# Altium PCB Tigershark 3D R1.8.PcbDoc (part 3 of 4)
Units mil, origin at the board's own origin, x right, y up, seen from the top; angles counter-clockwise.
Board outline 5500 x 4600 mil, 4 copper layers (Top Layer, Groun Plane, Power Plane, Bottom Layer), stack 61.73 mil thick; 307 components, 237 nets, 994 pads, 1215 vias.
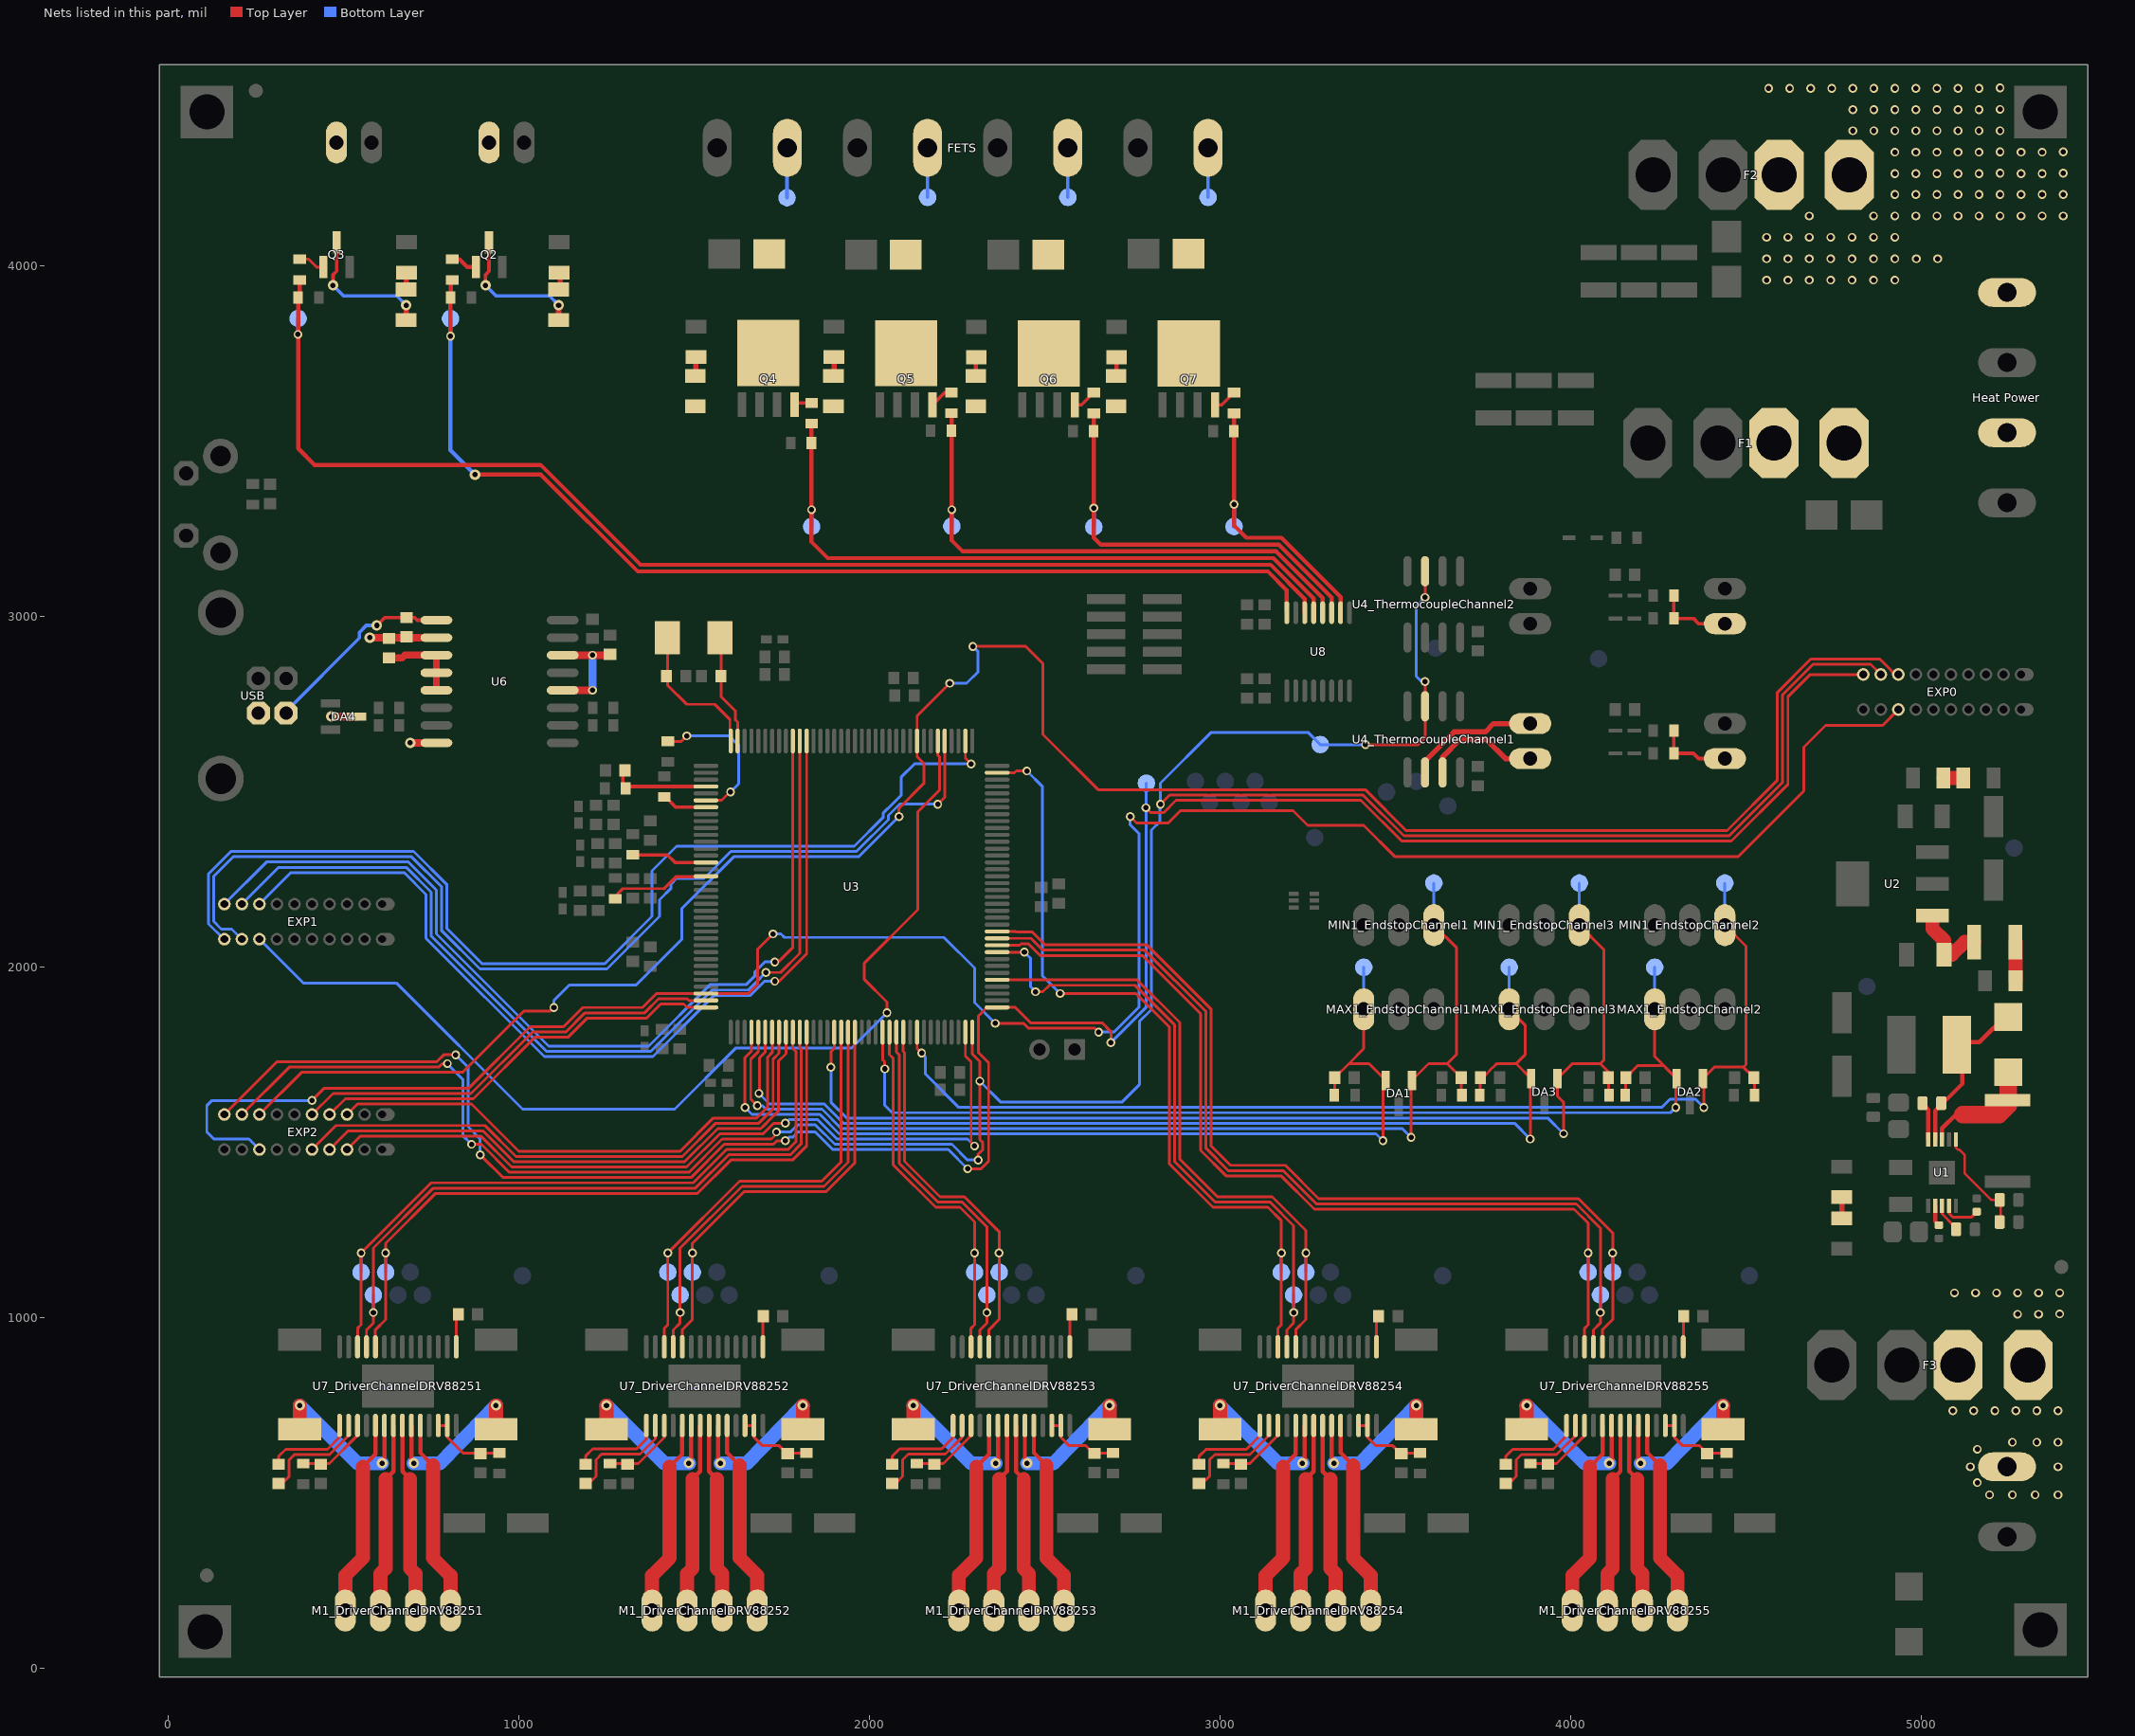
[diagram p5: the nets of this part, all layers, seen from the top]

## Via types
v1: diameter 25, hole 15, Top Layer to Bottom Layer, tented both sides, 594 vias
v2: diameter 30, hole 15, Top Layer to Bottom Layer, tented both sides, 518 vias
v3: diameter 19.68, hole 7.87, Top Layer to Bottom Layer, tented both sides, 75 vias
v4: diameter 50, hole 28, Top Layer to Bottom Layer, tented both sides, 10 vias
v5: diameter 45, hole 20, Top Layer to Bottom Layer, tented both sides, 9 vias
v6: diameter 30, hole 15, Top Layer to Bottom Layer, 9 vias

## Nets (pads, with @x,y where several pads share a name; then routed paths per layer and width w, separated by ;. In a path a pad name is that pad's centre, name@x,y a point inside that pad or via, vN(x,y) a via of type N, cw(c..) or ccw(c..) an arc to the next point about the centre after c; other vN are vias at no path point) (continued)
I2C_SCL: EXP0.3 EXP2.3 U3.70 | length 6434.8
  Top Layer w8: v1@412.5,1622.5 445,1655 857.57,1655 1032.57,1830 1127.57,1830 1182.57,1885 1352.57,1885 1392.46,1924.88 U3.70@1533.54,1924.88 1654.88,1924.88 1681.4,1951.4 1681.4,2051.4 v1(1725,2095) ; v1(2358.9,1840) 2440,1840 2453.5,1826.5 2642.4,1826.5 v1(2653.9,1815) ; v1(2743.9,2430) 2762.4,2411.5 2852.16,2411.5 2887.16,2446.5 3208.5,2446.5 3250,2405 3409.62,2405 3499.62,2315 4477.13,2315 4665,2502.87 4665,2627.57 4727.43,2690 4890,2690 EXP0.3@4935,2735
  Bottom Layer w8: EXP2.3@260,1480 230,1510 130,1510 110,1530 110,1605 125,1620 v1(410,1620) ; v1(1725,2095) 1747.57,2095 1757.57,2085 2212.57,2085 2300,1997.57 2300,1898.9 v1(2358.9,1840) ; v1(2653.9,1815) 2697.68,1815 2740,1857.32 2740,1857.43 2768.9,1886.32 2768.9,2381.1 2743.9,2406.1 v1(2743.9,2430)
I2C_SDA: EXP0.18 EXP2.18 U3.9 | length 6212.1
  Top Layer w8: EXP2.18@260,1580 380,1700 838.93,1700 1013.93,1875 1090,1875 v1(1100,1885) ; v1(2084.25,2430) 2084.25,2453.65 2154.9,2524.29 2154.9,2581.46 2135.91,2600.45 U3.9@2135.91,2645.35 2135.91,2717.01 v1(2228.9,2810) ; v1(2295,2915) 2446.21,2915 2495,2866.21 2495,2663.93 2652.43,2506.5 3414.19,2506.5 3530.69,2390 4446.07,2390 4590,2533.93 4590,2783.93 4685.07,2879 4882.01,2879 4914,2847.01 4914,2846 4925,2835 EXP0.18@4935,2835
  Bottom Layer w8: v1(1100,1885) 1100,1905 1144,1949 1334.67,1949 1465,2079.33 1465,2167.43 1612.57,2315 1969.25,2315 v1(2084.25,2430) ; v1(2228.9,2810) 2277.13,2810 2310,2842.87 2310,2900 v1(2295,2915)
INPUT_GND: C58.1 C59.1 DA4.3 U6.2 U6.8 USB.4 | length 337.2
  Top Layer w22: v2(465,2715) DA4.3@537.4,2715 ; v2(575,2940) U6.2@764.88,2940 ; v2(690,2640) U6.8@764.88,2640
MAX_ES1: C2_EndstopChannel1.1 DA1.2 MAX1_EndstopChannel1.1 R3_EndstopChannel1.2 TP10_EndstopChannel1.1 U3.76 | length 2781.9
  Top Layer w8: v1(1645,1600) 1645,1742.43 1663.46,1760.89 U3.76@1663.46,1814.65 ; R3_EndstopChannel1.2@3325.94,1635 3327.44,1636.5 C2_EndstopChannel1.1@3327.44,1685 3367.44,1725 ; MAX1_EndstopChannel1.1@3410,1880 3410,1767.56 3367.44,1725 ; v1(3465,1505) 3465,1669.8 DA1.2@3472.6,1677.4 3425,1725 3367.44,1725
  Bottom Layer w8: v1(1645,1600) 1665,1580 1858.64,1580 1913.64,1525 3445,1525 v1(3465,1505) ; MAX1_EndstopChannel1.1@3410,1880 TP10_EndstopChannel1.1@3410,2000
MAX_ES2: C2_EndstopChannel2.1 DA2.2 MAX1_EndstopChannel2.1 R3_EndstopChannel2.2 TP10_EndstopChannel2.1 U3.95 | length 3081.9
  Top Layer w8: U3.95@2037.48,1814.65 2037.48,1736.42 2043.9,1730 v1(2043.9,1710) ; R3_EndstopChannel2.2@4155.94,1635 4157.44,1636.5 C2_EndstopChannel2.1@4157.44,1685 4192.44,1720 4265,1720 ; MAX1_EndstopChannel2.1@4240,1880 4240,1745 DA2.2@4302.6,1682.4 4300,1679.8 v1(4300,1600)
  Bottom Layer w8: v1(2043.9,1710) 2043.9,1606.1 2065,1585 4285,1585 v1(4300,1600) ; MAX1_EndstopChannel2.1@4240,1880 TP10_EndstopChannel2.1@4240,2000
MAX_ES3: C2_EndstopChannel3.1 DA3.2 MAX1_EndstopChannel3.1 R3_EndstopChannel3.2 TP10_EndstopChannel3.1 U3.78 | length 3144.2
  Top Layer w8: v1(1685,1640) 1686.49,1641.49 1686.49,1741.49 1702.83,1757.83 U3.78@1702.83,1814.65 ; R3_EndstopChannel3.2@3740.94,1635 3742.44,1636.5 C2_EndstopChannel3.1@3742.44,1685 3749.95,1685 3770.81,1705.86 3770.81,1707.27 3777.25,1713.72 3778.67,1713.72 3790.39,1725.43 3845.43,1725.43 3870,1750 3870,1835 MAX1_EndstopChannel3.1@3825,1880 ; 3845,1725 DA3.2@3887.6,1682.4 3885,1679.8 v1(3885,1510)
  Bottom Layer w8: v1(1685,1640) 1715,1610 1871.07,1610 1926.07,1555 3840,1555 v1(3885,1510) ; MAX1_EndstopChannel3.1@3825,1880 TP10_EndstopChannel3.1@3825,2000
MCCDZ: EXP2.14 U3.72 | length 1207.9
  Top Layer w8: EXP2.14@460,1580 505,1625 870,1625 1045,1800 1140,1800 1195,1855 1365,1855 1404.88,1894.88 1470.12,1894.88 1479.49,1885.51 U3.72@1533.54,1885.51
MCCK: EXP2.15 U3.71 | length 1262.1
  Top Layer w8: EXP2.15@410,1580 470,1640 863.79,1640 1038.79,1815 1133.79,1815 1188.79,1870 1358.79,1870 1398.67,1909.88 1480.12,1909.88 1484.8,1905.2 U3.71@1533.54,1905.2
MCDZ0: EXP2.8 U3.107 | length 2265.2
  Top Layer w8: EXP2.8@510,1480 548.5,1518.5 890.95,1518.5 979.45,1430 1478.64,1430 1573.64,1525 1696.87,1525 1711.5,1539.63 1711.5,1539.73 1725.27,1553.5 1725.37,1553.5 1726.87,1555 v1(1760,1555) ; U3.107@2273.7,1814.65 2273.7,1746.3 2290,1730 2290,1500 v1(2300,1490)
  Bottom Layer w8: v1(1760,1555) 1770,1565 1852.43,1565 1907.43,1510 2280,1510 v1(2300,1490)
MCDZ1: EXP2.7 U3.81 | length 1633
  Top Layer w8: EXP2.7@460,1480 513.5,1533.5 897.16,1533.5 985.66,1445 1472.43,1445 1567.43,1540 1690.66,1540 1696.5,1545.84 1696.5,1545.95 1719.05,1568.5 1719.16,1568.5 1740,1589.34 1740,1731.36 1761.89,1753.25 U3.81@1761.89,1814.65
MCDZ2: EXP2.6 U3.80 | length 1662.4
  Top Layer w8: EXP2.6@410,1480 478.5,1548.5 903.37,1548.5 991.87,1460 1466.21,1460 1561.21,1555 1684.34,1555 1712.84,1583.5 1712.95,1583.5 1725,1595.55 1725,1737.57 1742.2,1754.78 U3.80@1742.2,1814.65
MCDZ3: EXP2.13 U3.79 | length 1538.9
  Top Layer w8: EXP2.13@510,1580 540,1610 865,1610 1000,1475 1460,1475 1555,1570 1678.13,1570 1706.63,1598.5 1706.73,1598.5 1710,1601.77 1710,1743.79 1722.52,1756.31 U3.79@1722.52,1814.65
MIN_ES1: C1_EndstopChannel1.1 DA1.1 MIN1_EndstopChannel1.1 R2_EndstopChannel1.2 TP9_EndstopChannel1.1 U3.77 | length 3076.9
  Top Layer w8: v1(1679.95,1605.05) 1661.5,1623.5 1661.5,1737.71 1683.15,1759.36 U3.77@1683.15,1814.65 ; v1(3545,1515) 3545,1665 3540,1670 DA1.1@3547.4,1677.4 3595,1725 3648.03,1725 ; MIN1_EndstopChannel1.1@3610,2120 3675,2055 3675,1751.97 3648.03,1725 ; R2_EndstopChannel1.2@3690,1635 3688.03,1636.97 C1_EndstopChannel1.1@3688.03,1685 3648.03,1725
  Bottom Layer w8: v1(1679.95,1605.05) 1694.95,1605.05 1705,1595 1864.85,1595 1919.85,1540 3520,1540 v1(3545,1515) ; MIN1_EndstopChannel1.1@3610,2120 TP9_EndstopChannel1.1@3610,2240
MIN_ES2: C1_EndstopChannel2.1 DA2.1 MIN1_EndstopChannel2.1 R2_EndstopChannel2.2 TP9_EndstopChannel2.1 U3.100 | length 3267
  Top Layer w8: U3.100@2135.91,1814.65 2135.91,1767.99 v1(2148.9,1755) ; v1(4380,1600) 4380,1679.8 DA2.1@4377.4,1682.4 4410,1715 4493.03,1715 ; MIN1_EndstopChannel2.1@4440,2120 4500,2060 4500,1721.97 4493.03,1715 ; R2_EndstopChannel2.2@4525,1635 4525,1683.03 C1_EndstopChannel2.1@4523.03,1685 4493.03,1715
  Bottom Layer w8: v1(2148.9,1755) 2160,1743.9 2160,1695 2255,1600 4260,1600 4283.5,1623.5 4356.5,1623.5 v1(4380,1600) ; MIN1_EndstopChannel2.1@4440,2120 TP9_EndstopChannel2.1@4440,2240
MIN_ES3: C1_EndstopChannel3.1 DA3.1 MIN1_EndstopChannel3.1 R2_EndstopChannel3.2 TP9_EndstopChannel3.1 U3.88 | length 3281.5
  Top Layer w8: v1(1890,1715) 1890,1758.79 1899.69,1768.47 U3.88@1899.69,1814.65 ; v1(3980,1525) 3980,1615 3962.4,1632.6 DA3.1@3962.4,1682.4 4005,1725 4085,1725 ; MIN1_EndstopChannel3.1@4025,2120 4095,2050 4095,1734.91 4085.04,1724.96 4108.03,1701.97 C1_EndstopChannel3.1@4108.03,1685 R2_EndstopChannel3.2@4108.03,1636.97
  Bottom Layer w8: v1(1890,1715) 1890,1615 1935,1570 3935,1570 v1(3980,1525) ; MIN1_EndstopChannel3.1@4025,2120 TP9_EndstopChannel3.1@4025,2240
MISO: EXP0.19 EXP2.19 TP7.1 U3.108 U4_ThermocoupleChannel1.7 U4_ThermocoupleChannel2.7 | length 8055.1
  Top Layer w8: EXP2.19@210,1580 345,1715 771.87,1715 781.87,1725 v1(795.94,1725) ; v1(865,1495) 893.23,1495 973.23,1415 1484.85,1415 1579.85,1510 1720,1510 1735,1525 v1(1735,1530) ; U3.108@2293.39,1814.65 2293.39,1752.83 2315,1731.21 v1(2315,1675) 2315,1508.23 2323.5,1499.73 2323.5,1480.27 2310,1466.77 v1(2310,1450) ; v1(2830,2465) 2856.5,2491.5 3407.98,2491.5 3524.48,2375 4452.28,2375 4605,2527.72 4605,2777.72 4691.28,2864 4856,2864 EXP0.19@4885,2835 ; v1(3415,2635) 3565,2635 3585,2655 U4_ThermocoupleChannel1.7@3585,2744.49 v1(3585,2815) ; v1(3585,3055) U4_ThermocoupleChannel2.7@3585,3129.49
  Bottom Layer w8: v1@802.5,1717.5 840,1680 840,1520 v1(865,1495) ; v1(1735,1530) 1775,1530 1795,1550 1846.21,1550 1901.21,1495 2235,1495 2280,1450 v1(2310,1450) ; v1(2315,1675) 2375,1615 2720,1615 2770,1665 2770,1845 2803.9,1878.9 2803.9,2390.9 2828.9,2415.9 2828.9,2463.9 v1(2830,2465) 2830,2525 2975,2670 3251,2670 TP7.1@3286,2635 v1(3415,2635) ; v1(3585,2815) 3575,2815 3560,2830 3560,3030 v1(3585,3055)
MOD0E1: TP37_DriverChannelDRV88251.1 U3.84 U7_DriverChannelDRV88251.24 | length 2002.7
  Top Layer w8: U7_DriverChannelDRV88251.24@591.02,917.2 591.02,966.02 620,995 v1(620,1185) 620,1212.57 762.43,1355 1509.71,1355 1604.71,1450 1780.66,1450 1820.94,1490.28 U3.84@1820.94,1814.65
  Bottom Layer w8: TP37_DriverChannelDRV88251.1@620,1130 v1(620,1185)
MOD0E2: TP37_DriverChannelDRV88252.1 U3.91 U7_DriverChannelDRV88252.24 | length 1293.6
  Top Layer w8: U7_DriverChannelDRV88252.24@1466.02,917.2 1466.02,966.02 1495,995 v1(1495,1185) 1495,1212.57 1642.43,1360 1876.36,1360 1958.74,1442.38 U3.91@1958.74,1814.65
  Bottom Layer w8: TP37_DriverChannelDRV88252.1@1495,1130 v1(1495,1185)
MOD0E3: TP37_DriverChannelDRV88253.1 U3.98 U7_DriverChannelDRV88253.24 | length 1118.4
  Top Layer w8: U3.98@2096.54,1814.65 2096.54,1759.68 2100,1756.21 2100,1446.36 2201.36,1345 2270.76,1345 2370,1245.76 v1(2370,1185) 2370,995 2341.02,966.02 U7_DriverChannelDRV88253.24@2341.02,917.2
  Bottom Layer w8: TP37_DriverChannelDRV88253.1@2370,1130 v1(2370,1185)
MOD0E4: TP37_DriverChannelDRV88254.1 U3.113 U7_DriverChannelDRV88254.24 | length 1804.3
  Top Layer w8: U3.113@2364.25,1964.25 2763.17,1964.25 2885,1842.43 2885,1452.43 2992.43,1345 3149.08,1345 3245,1249.08 v1(3245,1185) 3245,995 3216.02,966.02 U7_DriverChannelDRV88254.24@3216.02,917.2
  Bottom Layer w8: TP37_DriverChannelDRV88254.1@3245,1130 v1(3245,1185)
MOD0E5: TP37_DriverChannelDRV88255.1 U3.120 U7_DriverChannelDRV88255.24 | length 2732.5
  Top Layer w8: U3.120@2364.25,2102.05 2417.95,2102.05 2420,2100 2465,2100 2501.38,2063.62 2791.08,2063.62 2975,1879.71 2975,1489.71 3029.71,1435 3186.36,1435 3281.36,1340 4022.43,1340 4120,1242.43 v1(4120,1185) 4120,995 4091.02,966.02 U7_DriverChannelDRV88255.24@4091.02,917.2
  Bottom Layer w8: TP37_DriverChannelDRV88255.1@4120,1130 v1(4120,1185)
MOD1E1: TP36_DriverChannelDRV88251.1 U3.83 U7_DriverChannelDRV88251.25 | length 2003.3
  Top Layer w8: U7_DriverChannelDRV88251.25@565.43,917.2 565.43,965.43 585,985 v1(585,1015) 585,1198.79 756.21,1370 1503.49,1370 1598.49,1465 1774.45,1465 1805,1495.55 1805,1766.21 1801.26,1769.95 U3.83@1801.26,1814.65
  Bottom Layer w8: v1(585,1015) TP36_DriverChannelDRV88251.1@585,1065
MOD1E2: TP36_DriverChannelDRV88252.1 U3.90 U7_DriverChannelDRV88252.25 | length 1291
  Top Layer w8: U7_DriverChannelDRV88252.25@1440.43,917.2 1440.43,965.43 1460,985 v1(1460,1015) 1460,1198.79 1636.21,1375 1870.15,1375 1939.06,1443.91 U3.90@1939.06,1814.65
  Bottom Layer w8: v1(1460,1015) TP36_DriverChannelDRV88252.1@1460,1065
MOD1E3: TP36_DriverChannelDRV88253.1 U3.97 U7_DriverChannelDRV88253.25 | length 1103.1
  Top Layer w8: U3.97@2076.85,1814.65 2076.85,1758.15 2085,1750 2085,1440.15 2195.15,1330 2264.54,1330 2335,1259.54 v1(2335,1015) 2335,985 2315.43,965.43 U7_DriverChannelDRV88253.25@2315.43,917.2
  Bottom Layer w8: v1(2335,1015) TP36_DriverChannelDRV88253.1@2335,1065
MOD1E4: TP36_DriverChannelDRV88254.1 U3.117 U7_DriverChannelDRV88254.25 | length 1863.9
  Top Layer w8: U3.117@2364.25,2042.99 v1(2442.01,2042.99) ; v1(2473.9,1930) 2495,1930 2513.5,1948.5 2757.71,1948.5 2870,1836.21 2870,1446.21 2986.21,1330 3142.87,1330 3210,1262.87 v1(3210,1015) 3210,985 3190.43,965.43 U7_DriverChannelDRV88254.25@3190.43,917.2
  Bottom Layer w8: v1(2442.01,2042.99) 2460,2025 2460,1943.9 v1(2473.9,1930) ; v1(3210,1015) TP36_DriverChannelDRV88254.1@3210,1065
MOD1E5: TP36_DriverChannelDRV88255.1 U3.119 U7_DriverChannelDRV88255.25 | length 2688.5
  Top Layer w8: U3.119@2364.25,2082.36 2461.26,2082.36 2495,2048.62 2784.87,2048.62 2960,1873.49 2960,1483.49 3023.49,1420 3180.15,1420 3275.15,1325 4016.21,1325 4085,1256.21 v1(4085,1015) 4085,985 4065.43,965.43 U7_DriverChannelDRV88255.25@4065.43,917.2
  Bottom Layer w8: v1(4085,1015) TP36_DriverChannelDRV88255.1@4085,1065
MOD2E1: TP35_DriverChannelDRV88251.1 U3.82 U7_DriverChannelDRV88251.26 | length 2014.6
  Top Layer w8: U7_DriverChannelDRV88251.26@539.84,917.2 539.84,969.84 550,980 v1(550,1185) 750,1385 1497.28,1385 1592.28,1480 1768.23,1480 1790,1501.77 1790,1760 1781.57,1768.43 U3.82@1781.57,1814.65
  Bottom Layer w8: TP35_DriverChannelDRV88251.1@550,1130 v1(550,1185)
MOD2E2: TP35_DriverChannelDRV88252.1 U3.89 U7_DriverChannelDRV88252.26 | length 1298.5
  Top Layer w8: U7_DriverChannelDRV88252.26@1414.84,917.2 1414.84,969.84 1425,980 v1(1425,1185) 1630,1390 1863.93,1390 1919.37,1445.44 U3.89@1919.37,1814.65
  Bottom Layer w8: TP35_DriverChannelDRV88252.1@1425,1130 v1(1425,1185)
MOD2E3: TP35_DriverChannelDRV88253.1 U3.96 U7_DriverChannelDRV88253.26 | length 1097.9
  Top Layer w8: U3.96@2057.17,1814.65 2057.17,1750.34 2067.4,1740.11 2067.4,1436.54 2188.93,1315 2258.33,1315 2300,1273.33 v1(2300,1185) 2300,980 2289.84,969.84 U7_DriverChannelDRV88253.26@2289.84,917.2
  Bottom Layer w8: TP35_DriverChannelDRV88253.1@2300,1130 v1(2300,1185)
MOD2E4: TP35_DriverChannelDRV88254.1 U3.143 U7_DriverChannelDRV88254.26 | length 2307.9
  Top Layer w8: U3.143@2364.25,2554.8 2413.7,2554.8 2418.9,2560 v1(2448.9,2560) ; v1(2543.9,1925) 2760,1925 2855,1830 2855,1440 2980,1315 3136.65,1315 3175,1276.65 v1(3175,1185) 3175,980 3164.84,969.84 U7_DriverChannelDRV88254.26@3164.84,917.2
  Bottom Layer w8: v1(2448.9,2560) 2493.9,2515 2493.9,1975 v1(2543.9,1925) ; TP35_DriverChannelDRV88254.1@3175,1130 v1(3175,1185)
MOD2E5: TP35_DriverChannelDRV88255.1 U3.118 U7_DriverChannelDRV88255.26 | length 2657.7
  Top Layer w8: U3.118@2364.25,2062.68 2428.46,2062.68 2432.27,2066.49 2453.51,2066.49 2486.38,2033.62 2778.66,2033.62 2945,1867.28 2945,1477.28 3017.28,1405 3173.93,1405 3268.93,1310 4010,1310 4050,1270 v1(4050,1185) 4050,980 4039.84,969.84 U7_DriverChannelDRV88255.26@4039.84,917.2
  Bottom Layer w8: TP35_DriverChannelDRV88255.1@4050,1130 v1(4050,1185)
MODE0_EXP1: EXP1.1 U3.2 | length 3019.5
  Top Layer w8: U3.2@2273.7,2645.35 2273.7,2596.3 v1(2290,2580)
  Bottom Layer w8: EXP1.1@160,2080 158.79,2080 115,2123.79 115,2266.21 178.79,2330 700,2330 795,2235 795,2110 895,2010 1244.94,2010 1380,2145.06 1380,2275 1450,2345 1956.83,2345 2038.79,2426.96 2038.79,2438.98 2068.31,2468.5 2068.5,2468.5 2090,2490 2090,2541.77 2128.23,2580 2275,2580
MODE0_EXP2: EXP1.20 U3.27 | length 2664.4
  Top Layer w8: v1(1730,2015) 1740,2015 1781.57,2056.57 U3.27@1781.57,2645.35
  Bottom Layer w8: EXP1.20@160,2180 280,2300 685,2300 765,2220 765,2095 1085,1775 1370,1775 1545,1950 1648.23,1950 1673.5,1975.27 1673.5,1987.29 1701.21,2015 v1@1720,2015
MODE1_EXP1: EXP1.2 U3.5 | length 2949.5
  Top Layer w8: v1(2195,2465) 2214.9,2484.9 2214.9,2645.1 U3.5@2214.65,2645.35
  Bottom Layer w8: EXP1.2@210,2080 181,2109 151,2109 130,2130 130,2260 185,2315 693.79,2315 780,2228.79 780,2103.79 888.79,1995 1251.16,1995 1401.5,2145.34 1401.5,2192.71 1434.39,2225.61 1434.39,2237.63 1450.27,2253.5 1528.5,2253.5 1605,2330 1963.04,2330 2054.02,2420.98 2054.02,2433 2074.52,2453.5 2074.71,2453.5 2086.21,2465 v1(2195,2465)
MODE1_EXP2: EXP1.19 U3.26 | length 2647.2
  Top Layer w8: v1(1705,1985) 1746.36,1985 1801.26,2039.9 U3.26@1801.26,2645.35
  Bottom Layer w8: EXP1.19@210,2180 315,2285 678.79,2285 750,2213.79 750,2088.79 1078.79,1760 1376.21,1760 1551.21,1935 1654.45,1935 1688.5,1969.05 1688.5,1969.71 1703.79,1985 v1(1705,1985)
MODE2_EXP1: EXP1.3 U3.6 | length 2997.6
  Top Layer w8: v1(2050,1870) 2050,1900.61 1985.61,1965 1985.61,2011.97 2137.75,2164.11 2137.75,2443.51 2199.9,2505.65 2199.9,2600.1 2194.96,2605.04 U3.6@2194.96,2645.35
  Bottom Layer w8: EXP1.3@260,2080 385,1955 650.44,1955 1010.44,1595 1444.56,1595 1619.56,1770 1950,1770 v1(2050,1870)
MODE2_EXP2: EXP1.18 U3.25 | length 2617.4
  Top Layer w8: v1(1730,1960) 1742.57,1960 1820.94,2038.37 U3.25@1820.94,2645.35
  Bottom Layer w8: EXP1.18@260,2180 350,2270 672.57,2270 735,2207.57 735,2082.57 1072.57,1745 1382.43,1745 1557.43,1920 1660.66,1920 1700.66,1960 v1(1730,1960)
MOSI: EXP0.20 EXP2.20 TP8.1 U3.109 | length 6742
  Top Layer w8: EXP2.20@160,1580 310,1730 765.66,1730 785.66,1750 v1(820,1750) ; v1(890,1465) 955,1400 1491.07,1400 1586.07,1495 1726.21,1495 1736.21,1505 v1(1760,1505) ; v1(2280,1425) 2318.23,1425 2340,1446.77 2340,1727.43 2310.29,1757.14 2310.29,1860.29 2335.51,1885.51 U3.109@2364.25,1885.51 2415.85,1885.51 2459.86,1841.5 2663.5,1841.5 2688.9,1816.1 v1(2688.9,1785) ; v1(2788.9,2455) 2802.4,2441.5 2839.73,2441.5 2874.73,2476.5 3401.76,2476.5 3518.26,2360 4458.49,2360 4620,2521.51 4620,2771.51 4683.49,2835 EXP0.20@4835,2835
  Bottom Layer w8: v1(820,1750) 855,1715 855,1545 888.5,1511.5 888.5,1466.5 v1(890,1465) ; v1(1760,1505) 1770,1515 1781.21,1515 1796.21,1530 1845,1530 1895,1480 2225,1480 v1(2280,1425) ; v1(2688.9,1785) 2755,1851.1 2755,1851.21 2788.9,1885.11 v1(2788.9,2455) 2788.9,2523.9 TP8.1@2790,2525
NetC4_2: C4.2 F4.1 U2.1 | length 225.8
  Top Layer w40: U2.1@5032.17,2147.45 5032.17,2109.83 5065.15,2076.85 C4.2@5065.15,2036 5088,2036 5124,2072 F4.1@5150.94,2072
NetC22_1: C22.1 U1.4 | length 112
  Top Layer w8: U1.4@5079.26,1319.83 5079.26,1297.97 5089.71,1287.52 5144.22,1287.52 C22.1@5159,1302.3
NetC40_1: C40.1 U1.10 | length 93.4
  Top Layer w12: C40.1@5014.23,1599.77 5020.2,1593.8 U1.10@5020.2,1508.8
NetC40_2: C40.2 D2.C L1.1 U1.9 | length 475.6
  Top Layer w12: U1.9@5039.89,1508.8 5039.89,1590.12 5067.77,1618 5116.74,1666.97 5116.74,1786 5166.26,1786 D2.C@5249,1868.74
NetC43_2: C43.2 U3.36 X2.1 | length 416.3
  Top Layer w8: X2.1@1423.9,2940 1423.9,2805 1478.9,2750 1558.9,2750 1602,2706.9 1602,2647.76 U3.36@1604.41,2645.35
NetC44_2: C44.2 U3.35 X2.2 | length 315.6
  Top Layer w8: X2.2@1573.5,2940 1576.46,2937.05 C44.2@1576.46,2830 1576.46,2772.44 1617,2731.9 1617,2706.68 1624.09,2699.59 U3.35@1624.09,2645.35
NetC56_2: C56.2 U6.12 U6.14 | length 317.3
  Top Layer w22: U6.12@1125.12,2790 v1(1210,2790) ; U6.14@1125.12,2890 v1(1210,2890) C56.2@1257.56,2890
  Bottom Layer w22: v1(1210,2790) v1(1210,2890)
NetC58_2: C58.2 U6.1 USB.1 | length 552.2
  Top Layer w10: v2(595,2975) 617.56,2997.56 C58.2@680,2997.56 702.44,2997.56 710,2990 U6.1@764.88,2990
  Bottom Layer w10: USB.1@336,2730 545,2939 545,2955 565,2975 v2(595,2975)
NetC59_2: C59.2 U6.3 U6.4 U6.5 | length 238
  Top Layer w20: C59.2@630,2882.44 667.44,2882.44 675,2890 U6.3@764.88,2890 U6.4@764.88,2840 U6.5@764.88,2790
NetC66_DriverChannelDRV88251_2: C66_DriverChannelDRV88251.2 R30_DriverChannelDRV88251.2 U7_DriverChannelDRV88251.3 | length 216.1
  Top Layer w8: R30_DriverChannelDRV88251.2@385,584.53 459.53,584.53 539.84,664.84 U7_DriverChannelDRV88251.3@539.84,692.8
NetC66_DriverChannelDRV88252_2: C66_DriverChannelDRV88252.2 R30_DriverChannelDRV88252.2 U7_DriverChannelDRV88252.3 | length 219.7
  Top Layer w8: R30_DriverChannelDRV88252.2@1260,584.53 1340.74,584.53 1414.84,658.63 U7_DriverChannelDRV88252.3@1414.84,692.8
NetC66_DriverChannelDRV88253_2: C66_DriverChannelDRV88253.2 R30_DriverChannelDRV88253.2 U7_DriverChannelDRV88253.3 | length 216.8
  Top Layer w8: R30_DriverChannelDRV88253.2@2135,584.53 2210.74,584.53 2289.84,663.63 U7_DriverChannelDRV88253.3@2289.84,692.8
NetC66_DriverChannelDRV88254_2: C66_DriverChannelDRV88254.2 R30_DriverChannelDRV88254.2 U7_DriverChannelDRV88254.3 | length 216.1
  Top Layer w8: R30_DriverChannelDRV88254.2@3010,584.53 3084.53,584.53 3164.84,664.84 U7_DriverChannelDRV88254.3@3164.84,692.8
NetC66_DriverChannelDRV88255_2: C66_DriverChannelDRV88255.2 R30_DriverChannelDRV88255.2 U7_DriverChannelDRV88255.3 | length 216.1
  Top Layer w8: R30_DriverChannelDRV88255.2@3885,584.53 3959.53,584.53 4039.84,664.84 U7_DriverChannelDRV88255.3@4039.84,692.8
NetC68_DriverChannelDRV88251_1: C68_DriverChannelDRV88251.1 U7_DriverChannelDRV88251.1 | length 256
  Top Layer w8: C68_DriverChannelDRV88251.1@325,582.56 315,592.56 315,605 335,625 454,625 488.66,659.66 U7_DriverChannelDRV88251.1@488.66,692.8
NetC68_DriverChannelDRV88251_2: C68_DriverChannelDRV88251.2 U7_DriverChannelDRV88251.2 | length 302.4
  Top Layer w8: C68_DriverChannelDRV88251.2@325,527.44 345,547.44 345,595 360,610 460.21,610 514.25,664.04 U7_DriverChannelDRV88251.2@514.25,692.8
NetC68_DriverChannelDRV88252_1: C68_DriverChannelDRV88252.1 U7_DriverChannelDRV88252.1 | length 259.5
  Top Layer w8: C68_DriverChannelDRV88252.1@1200,582.56 1190,592.56 1190,605 1211,626 1336,626 1363.66,653.66 U7_DriverChannelDRV88252.1@1363.66,692.8
NetC68_DriverChannelDRV88252_2: C68_DriverChannelDRV88252.2 U7_DriverChannelDRV88252.2 | length 308.2
  Top Layer w8: C68_DriverChannelDRV88252.2@1200,527.44 1220,547.44 1220,595 1236,611 1346,611 1389.25,654.25 U7_DriverChannelDRV88252.2@1389.25,692.8
NetC68_DriverChannelDRV88253_1: C68_DriverChannelDRV88253.1 U7_DriverChannelDRV88253.1 | length 256.6
  Top Layer w8: C68_DriverChannelDRV88253.1@2075,582.56 2065,592.56 2065,605 2086,626 2206,626 2238.66,658.66 U7_DriverChannelDRV88253.1@2238.66,692.8
NetC68_DriverChannelDRV88253_2: C68_DriverChannelDRV88253.2 U7_DriverChannelDRV88253.2 | length 305.3
  Top Layer w8: C68_DriverChannelDRV88253.2@2075,527.44 2095,547.44 2095,595 2111,611 2216,611 2264.25,659.25 U7_DriverChannelDRV88253.2@2264.25,692.8
NetC68_DriverChannelDRV88254_1: C68_DriverChannelDRV88254.1 U7_DriverChannelDRV88254.1 | length 253.7
  Top Layer w8: C68_DriverChannelDRV88254.1@2950,582.56 2940,592.56 2940,605 2960,625 3075,625 3113.66,663.66 U7_DriverChannelDRV88254.1@3113.66,692.8
NetC68_DriverChannelDRV88254_2: C68_DriverChannelDRV88254.2 U7_DriverChannelDRV88254.2 | length 302.3
  Top Layer w8: C68_DriverChannelDRV88254.2@2950,527.44 2970,547.44 2970,595 2985,610 3085,610 3139.25,664.25 U7_DriverChannelDRV88254.2@3139.25,692.8
NetC68_DriverChannelDRV88255_1: C68_DriverChannelDRV88255.1 U7_DriverChannelDRV88255.1 | length 253.7
  Top Layer w8: C68_DriverChannelDRV88255.1@3825,582.56 3815,592.56 3815,605 3835,625 3950,625 3988.66,663.66 U7_DriverChannelDRV88255.1@3988.66,692.8
NetC68_DriverChannelDRV88255_2: C68_DriverChannelDRV88255.2 U7_DriverChannelDRV88255.2 | length 302.3
  Top Layer w8: C68_DriverChannelDRV88255.2@3825,527.44 3845,547.44 3845,595 3860,610 3960,610 4014.25,664.25 U7_DriverChannelDRV88255.2@4014.25,692.8
NetC71_DriverChannelDRV88251_2: C71_DriverChannelDRV88251.2 U7_DriverChannelDRV88251.15 | length 94.4
  Top Layer w8: C71_DriverChannelDRV88251.2@817.44,1010 821.34,1006.1 U7_DriverChannelDRV88251.15@821.34,917.2
NetC71_DriverChannelDRV88252_2: C71_DriverChannelDRV88252.2 U7_DriverChannelDRV88252.15 | length 94.4
  Top Layer w8: C71_DriverChannelDRV88252.2@1692.44,1010 1696.34,1006.1 U7_DriverChannelDRV88252.15@1696.34,917.2
NetC71_DriverChannelDRV88253_2: C71_DriverChannelDRV88253.2 U7_DriverChannelDRV88253.15 | length 94.4
  Top Layer w8: C71_DriverChannelDRV88253.2@2567.44,1010 2571.34,1006.1 U7_DriverChannelDRV88253.15@2571.34,917.2
NetC71_DriverChannelDRV88254_2: C71_DriverChannelDRV88254.2 U7_DriverChannelDRV88254.15 | length 94.4
  Top Layer w8: C71_DriverChannelDRV88254.2@3442.44,1010 3446.34,1006.1 U7_DriverChannelDRV88254.15@3446.34,917.2
NetC71_DriverChannelDRV88255_2: C71_DriverChannelDRV88255.2 U7_DriverChannelDRV88255.15 | length 94.4
  Top Layer w8: C71_DriverChannelDRV88255.2@4317.44,1010 4321.34,1006.1 U7_DriverChannelDRV88255.15@4321.34,917.2
NetC73_2: C73.2 R23.2 U3.40 | length 282.9
  Top Layer w10: C73.2@1296.46,2561.22 1296.46,2515.43 U3.40@1533.54,2515.43
NetC75_DriverChannelDRV88251_2: C75_DriverChannelDRV88251.2 R31_DriverChannelDRV88251.1 U7_DriverChannelDRV88251.12 U7_DriverChannelDRV88251.13 | length 226.9
  Top Layer w8: U7_DriverChannelDRV88251.12@770.16,692.8 U7_DriverChannelDRV88251.13@795.75,692.8 795.75,659.25 840.47,614.53 R31_DriverChannelDRV88251.1@945,614.53
NetC75_DriverChannelDRV88252_2: C75_DriverChannelDRV88252.2 R31_DriverChannelDRV88252.1 U7_DriverChannelDRV88252.12 U7_DriverChannelDRV88252.13 | length 226.9
  Top Layer w8: U7_DriverChannelDRV88252.12@1645.16,692.8 U7_DriverChannelDRV88252.13@1670.75,692.8 1670.75,659.25 1695,635 1742.56,635 1763.03,614.53 R31_DriverChannelDRV88252.1@1820,614.53
NetC75_DriverChannelDRV88253_2: C75_DriverChannelDRV88253.2 R31_DriverChannelDRV88253.1 U7_DriverChannelDRV88253.12 U7_DriverChannelDRV88253.13 | length 226.9
  Top Layer w8: U7_DriverChannelDRV88253.12@2520.16,692.8 U7_DriverChannelDRV88253.13@2545.75,692.8 2545.75,659.25 2570,635 2617.56,635 2638.03,614.53 R31_DriverChannelDRV88253.1@2695,614.53
NetC75_DriverChannelDRV88254_2: C75_DriverChannelDRV88254.2 R31_DriverChannelDRV88254.1 U7_DriverChannelDRV88254.12 U7_DriverChannelDRV88254.13 | length 226.9
  Top Layer w8: U7_DriverChannelDRV88254.12@3395.16,692.8 U7_DriverChannelDRV88254.13@3420.75,692.8 3420.75,659.25 3445,635 3492.56,635 3513.03,614.53 R31_DriverChannelDRV88254.1@3570,614.53
NetC75_DriverChannelDRV88255_2: C75_DriverChannelDRV88255.2 R31_DriverChannelDRV88255.1 U7_DriverChannelDRV88255.12 U7_DriverChannelDRV88255.13 | length 226.9
  Top Layer w8: U7_DriverChannelDRV88255.12@4270.16,692.8 U7_DriverChannelDRV88255.13@4295.75,692.8 4295.75,659.25 4320,635 4367.56,635 4388.03,614.53 R31_DriverChannelDRV88255.1@4445,614.53
NetD2_A: D2.A R9.2 U1.8 | length 326.9
  Top Layer w12: U1.8@5059.57,1508.8 5059.57,1540.67 5098.78,1579.88 5118,1579.88
  Top Layer w50: 5118,1579.88 5222.74,1579.88 R9.2@5248,1605.14 ; R9.2@5248,1620.14 D2.A@5248,1700
NetD7_2: D7.2 R8.1 | length 60
  Top Layer w15: D7.2@4773.57,1284.04 R8.1@4773.57,1344.01
NetD9_2: D9.2 R11.1 | length 56
  Top Layer w40: D9.2@5063.73,2540 R11.1@5119.69,2540
NetD10_1: D10.1 FAN-1.2 Q2.3 | length 400.9
  Top Layer w10: v2(905,3945) 905,3975 915,3985 Q2.3@915,4068.01
  Top Layer w15: D10.1@1113.5,3846.61 v2(1113.5,3888.5)
  Bottom Layer w10: v2(905,3945) 935,3915 1087.01,3915 v2(1113.5,3888.5)
NetD10_2: D10.2 R13.2 | length 48.5
  Top Layer w15: D10.2@1118.5,3933.23 R13.2@1118.5,3981.69
NetD11_1: D11.1 FAN-2.2 Q3.3 | length 406.9
  Top Layer w10: v2(470,3945) 470,3975 480,3985 Q3.3@480,4068.01
  Top Layer w15: D11.1@668.5,3845 D11.1@672.7,3840.81 ; D11.1@678.5,3846.61 v2(678.5,3888.5)
  Bottom Layer w10: v2(470,3945) 500,3915 652.01,3915 v2(678.5,3888.5)
NetD11_2: D11.2 R47.2 | length 52
  Top Layer w15: D11.2@678.5,3933.23 R47.2@678.5,3985.2
NetD12_1: D12.1 D13.1 FETS.2 Q4.5 TP11.1 | length 142.7
  Bottom Layer w10: TP11.1@1765,4195 FETS.2@1765,4336.32
  Bottom Layer w40: FETS.2@1765,4336.32 FETS.2@1766,4337.32
NetD13_2: D13.2 R56.1 | length 54.1
  Top Layer w8: D13.2@1503.5,3686.87 D13.2@1505,3688.36
  Top Layer w15: D13.2@1505,3688.36 R56.1@1505,3740.33
NetD14_1: D14.1 D15.1 FETS.4 Q5.5 TP12.1 | length 141.3
  Bottom Layer w10: TP12.1@2166,4196 FETS.4@2166,4337.32
NetD14_2: D14.2 R60.1 | length 52
  Top Layer w15: D14.2@1899,3688.36 R60.1@1899,3740.33
NetD16_1: D16.1 D17.1 FETS.6 Q6.5 TP13.1 | length 141.3
  Bottom Layer w10: TP13.1@2566,4196 FETS.6@2566,4337.32
NetD16_2: D16.2 R64.1 | length 52
  Top Layer w12: D16.2@2303.5,3686.44 R64.1@2303.5,3738.41
NetD18_1: D18.1 D19.1 FETS.8 Q7.5 TP14.1 | length 141.3
  Bottom Layer w10: TP14.1@2966,4196 FETS.8@2966,4337.32
NetD18_2: D18.2 R68.1 | length 52
  Top Layer w12: D18.2@2705,3687.94 R68.1@2705,3739.91
NetF1_1: "Heat Power.3" F1.1
NetF2_1: "Heat Power.1" F2.1
  other v1: 4559,3960 4620,3960 4681,3960 4742,3960 4803,3960 4864,3960 4925,3960 4559,4021 4620,4021 4681,4021 4742,4021 4803,4021 4864,4021 4925,4021 4986,4021 5047,4021 4559,4082 4620,4082 4681,4082 4742,4082 4803,4082 4864,4082 4925,4082 4681,4143 4864,4143 4925,4143 4985,4143 5045,4143 5105,4143 5165,4143 5225,4143 5285,4143 5345,4143 5405,4143 4925,4204 4985,4204 5045,4204 5105,4204 5165,4204 5225,4204 5285,4204 5345,4204 5405,4204 4925,4264 4985,4264 5045,4264 5105,4264 5165,4264 5285,4264 5345,4264 5225,4265 5405,4265 4925,4325 4985,4325 5045,4325 5105,4325 5165,4325 5285,4325 5345,4325 5225,4326 5405,4326 4805,4386 4865,4386 4925,4386 4985,4386 5045,4386 5105,4386 5165,4386 5225,4386 4805,4446 4865,4446 4925,4446 4985,4446 5045,4446 5105,4446 5165,4446 5225,4447 4565,4507 4625,4507 4685,4507 4745,4507 4805,4507 4865,4507 4925,4507 4985,4507 5045,4507 5105,4507 5165,4507 5225,4508
NetF3_1: "Motor Power.1" F3.1
  other v1: 5195,495 5260,495 5325,495 5390,495 5160,530 5140,575 5390,575 5160,625 5260,645 5330,645 5390,645 5090,735 5150,735 5210,735 5270,735 5330,735 5390,735 5275,1010 5335,1010 5395,1011 5095,1071 5155,1071 5215,1071 5275,1071 5335,1071 5395,1071
NetF4_2: F4.2 R25.2 | length 110.7
  Top Layer w40: R25.2@5269.06,1961.25 F4.2@5269.06,2072
NetM1_DriverChannelDRV88251_1: M1_DriverChannelDRV88251.1 U7_DriverChannelDRV88251.5 | length 563.4
  Top Layer w12: 555,575 591.02,611.02 U7_DriverChannelDRV88251.5@591.02,692.8
  Top Layer w40: M1_DriverChannelDRV88251.1@505,165 505,265 555,315 555,575
NetM1_DriverChannelDRV88251_2: M1_DriverChannelDRV88251.2 U7_DriverChannelDRV88251.7 | length 543.2
  Top Layer w12: 620,540 642.2,562.2 U7_DriverChannelDRV88251.7@642.2,692.8
  Top Layer w40: M1_DriverChannelDRV88251.2@605,165 605,270 620,285 620,540
NetM1_DriverChannelDRV88251_3: M1_DriverChannelDRV88251.3 U7_DriverChannelDRV88251.8 | length 543.2
  Top Layer w12: U7_DriverChannelDRV88251.8@667.8,692.8 667.8,562.2 690,540
  Top Layer w40: 690,540 690,285 705,270 M1_DriverChannelDRV88251.3@705,165
NetM1_DriverChannelDRV88251_4: M1_DriverChannelDRV88251.4 U7_DriverChannelDRV88251.10 | length 563.4
  Top Layer w12: U7_DriverChannelDRV88251.10@718.98,692.8 718.98,615 755,578.98
  Top Layer w40: 755,578.98 755,315 805,265 M1_DriverChannelDRV88251.4@805,165
NetM1_DriverChannelDRV88252_1: M1_DriverChannelDRV88252.1 U7_DriverChannelDRV88252.5 | length 563.4
  Top Layer w12: 1430,575 1466.02,611.02 U7_DriverChannelDRV88252.5@1466.02,692.8
  Top Layer w40: M1_DriverChannelDRV88252.1@1380,165 1380,265 1430,315 1430,575
NetM1_DriverChannelDRV88252_2: M1_DriverChannelDRV88252.2 U7_DriverChannelDRV88252.7 | length 543.2
  Top Layer w12: 1495,540 1517.2,562.2 U7_DriverChannelDRV88252.7@1517.2,692.8
  Top Layer w40: M1_DriverChannelDRV88252.2@1480,165 1480,270 1495,285 1495,540
NetM1_DriverChannelDRV88252_3: M1_DriverChannelDRV88252.3 U7_DriverChannelDRV88252.8 | length 543.2
  Top Layer w12: U7_DriverChannelDRV88252.8@1542.8,692.8 1542.8,562.2 1565,540
  Top Layer w40: 1565,540 1565,285 1580,270 M1_DriverChannelDRV88252.3@1580,165
NetM1_DriverChannelDRV88252_4: M1_DriverChannelDRV88252.4 U7_DriverChannelDRV88252.10 | length 563.4
  Top Layer w12: U7_DriverChannelDRV88252.10@1593.98,692.8 1593.98,615 1630,578.98
  Top Layer w40: 1630,578.98 1630,315 1680,265 M1_DriverChannelDRV88252.4@1680,165
NetM1_DriverChannelDRV88253_1: M1_DriverChannelDRV88253.1 U7_DriverChannelDRV88253.5 | length 563.4
  Top Layer w12: 2305,575 2341.02,611.02 U7_DriverChannelDRV88253.5@2341.02,692.8
  Top Layer w40: M1_DriverChannelDRV88253.1@2255,165 2255,265 2305,315 2305,575
NetM1_DriverChannelDRV88253_2: M1_DriverChannelDRV88253.2 U7_DriverChannelDRV88253.7 | length 543.2
  Top Layer w12: 2370,540 2392.2,562.2 U7_DriverChannelDRV88253.7@2392.2,692.8
  Top Layer w40: M1_DriverChannelDRV88253.2@2355,165 2355,270 2370,285 2370,540
NetM1_DriverChannelDRV88253_3: M1_DriverChannelDRV88253.3 U7_DriverChannelDRV88253.8 | length 543.2
  Top Layer w12: U7_DriverChannelDRV88253.8@2417.8,692.8 2417.8,562.2 2440,540
  Top Layer w40: 2440,540 2440,285 2455,270 M1_DriverChannelDRV88253.3@2455,165
NetM1_DriverChannelDRV88253_4: M1_DriverChannelDRV88253.4 U7_DriverChannelDRV88253.10 | length 563.4
  Top Layer w12: U7_DriverChannelDRV88253.10@2468.98,692.8 2468.98,615 2505,578.98
  Top Layer w40: 2505,578.98 2505,315 2555,265 M1_DriverChannelDRV88253.4@2555,165
NetM1_DriverChannelDRV88254_1: M1_DriverChannelDRV88254.1 U7_DriverChannelDRV88254.5 | length 563.4
  Top Layer w12: 3180,575 3216.02,611.02 U7_DriverChannelDRV88254.5@3216.02,692.8
  Top Layer w40: M1_DriverChannelDRV88254.1@3130,165 3130,265 3180,315 3180,575
NetM1_DriverChannelDRV88254_2: M1_DriverChannelDRV88254.2 U7_DriverChannelDRV88254.7 | length 543.2
  Top Layer w12: 3245,540 3267.2,562.2 U7_DriverChannelDRV88254.7@3267.2,692.8
  Top Layer w40: M1_DriverChannelDRV88254.2@3230,165 3230,270 3245,285 3245,540
NetM1_DriverChannelDRV88254_3: M1_DriverChannelDRV88254.3 U7_DriverChannelDRV88254.8 | length 543.2
  Top Layer w12: U7_DriverChannelDRV88254.8@3292.8,692.8 3292.8,562.2 3315,540
  Top Layer w40: 3315,540 3315,285 3330,270 M1_DriverChannelDRV88254.3@3330,165
NetM1_DriverChannelDRV88254_4: M1_DriverChannelDRV88254.4 U7_DriverChannelDRV88254.10 | length 563.4
  Top Layer w12: U7_DriverChannelDRV88254.10@3343.98,692.8 3343.98,615 3380,578.98
  Top Layer w40: 3380,578.98 3380,315 3430,265 M1_DriverChannelDRV88254.4@3430,165
NetM1_DriverChannelDRV88255_1: M1_DriverChannelDRV88255.1 U7_DriverChannelDRV88255.5 | length 563.4
  Top Layer w12: 4055,575 4091.02,611.02 U7_DriverChannelDRV88255.5@4091.02,692.8
  Top Layer w40: M1_DriverChannelDRV88255.1@4005,165 4005,265 4055,315 4055,575
NetM1_DriverChannelDRV88255_2: M1_DriverChannelDRV88255.2 U7_DriverChannelDRV88255.7 | length 543.2
  Top Layer w12: 4120,540 4142.2,562.2 U7_DriverChannelDRV88255.7@4142.2,692.8
  Top Layer w40: M1_DriverChannelDRV88255.2@4105,165 4105,270 4120,285 4120,540
NetM1_DriverChannelDRV88255_3: M1_DriverChannelDRV88255.3 U7_DriverChannelDRV88255.8 | length 543.2
  Top Layer w12: U7_DriverChannelDRV88255.8@4167.8,692.8 4167.8,562.2 4190,540
  Top Layer w40: 4190,540 4190,285 4205,270 M1_DriverChannelDRV88255.3@4205,165
NetM1_DriverChannelDRV88255_4: M1_DriverChannelDRV88255.4 U7_DriverChannelDRV88255.10 | length 563.4
  Top Layer w12: U7_DriverChannelDRV88255.10@4218.98,692.8 4218.98,615 4255,578.98
  Top Layer w40: 4255,578.98 4255,315 4305,265 M1_DriverChannelDRV88255.4@4305,165
NetP2_ThermistorChannel1_1: P2_ThermistorChannel1.1 R14_ThermistorChannel1.2 R19_ThermistorChannel1.1 | length 216.7
  Top Layer w10: R19_ThermistorChannel1.1@4294.53,2675 R14_ThermistorChannel1.2@4294.53,2610 4350,2610 4365,2595 P2_ThermistorChannel1.1@4440,2595
NetP2_ThermistorChannel2_1: P2_ThermistorChannel2.1 R14_ThermistorChannel2.2 R19_ThermistorChannel2.1 | length 216.7
  Top Layer w10: R19_ThermistorChannel2.1@4294.53,3060 R14_ThermistorChannel2.2@4294.53,2995 4350,2995 4365,2980 P2_ThermistorChannel2.1@4440,2980
NetQ2_1: Q2.1 R45.2 | length 76.9
  Top Layer w12: R45.2@810,4019.53 830.47,4019.53 852.86,3997.14 Q2.1@877.6,3997.14
NetQ3_1: Q3.1 R52.2 | length 76.9
  Top Layer w8: R52.2@375,4019.53 400.47,4019.53 422.86,3997.14 Q3.1@442.6,3997.14
NetQ4_4: Q4.4 R58.2 | length 50.5
  Top Layer w10: Q4.4@1786.5,3604.66 1791.36,3609.53 R58.2@1835,3609.53
NetQ5_4: Q5.4 R62.2 | length 68.6
  Top Layer w10: Q5.4@2180,3604.28 2215.25,3639.53 R62.2@2234,3639.53
NetQ6_4: Q6.4 R66.2 | length 68.6
  Top Layer w10: Q6.4@2586,3603.85 2604.75,3603.85 R66.2@2640,3639.1
NetQ7_4: Q7.4 R70.2 | length 68.6
  Top Layer w10: Q7.4@2986,3603.85 3004.75,3603.85 R70.2@3040,3639.1
NetR4_1: R4.1 U3.51 | length 223.6
  Top Layer w10: R4.1@1318.9,2320.47 1423.43,2320.47 1445,2298.9 U3.51@1533.54,2298.9
NetR5_2: R5.2 U3.42 | length 434.8
  Top Layer w8: R5.2@1433.9,2644.06 1462.95,2644.06 v1(1478.9,2660) ; U3.42@1533.54,2476.06 1578.19,2476.06 v1@1603.9,2501.77
  Bottom Layer w8: v1(1478.9,2660) 1600,2660 1627.4,2632.6 1627.4,2525.27 1626.4,2524.27 1626.4,2522.5 v1(1603.9,2500)
NetR6_2: R6.2 U3.53 | length 291.8
  Top Layer w8: R6.2@1268.9,2196.46 1296.62,2224.19 1414.19,2224.19
  Top Layer w10: R6.2@1268.9,2195.47 R6.2@1268.9,2196.46 ; 1414.19,2224.19 1448.34,2258.34 1532.36,2258.34 U3.53@1533.54,2259.53
NetR7_1: R7.1 U1.3 | length 76.4
  Top Layer w8: U1.3@5059.57,1319.83 5059.57,1296.43 5091.86,1264.14 R7.1@5091.86,1256.84
NetR10_2: R10.2 R12.1 U1.6 | length 291.8
  Top Layer w7: U1.6@5098.94,1508.8 5098.94,1486.06 5105.82,1479.18 5109.51,1479.18 5124.44,1464.25 5124.44,1411.56 5200,1336 R10.2@5218.85,1336 ; R12.1@5226.4,1272.36 R10.2@5226.4,1328.45
NetR17_1: R17.1 U1.2 | length 56.9
  Top Layer w12: U1.2@5039.89,1319.83 5039.89,1275.73 R17.1@5048.95,1266.68
NetR22_2: R22.2 U3.43 | length 129.5
  Top Layer w10: R22.2@1416.95,2487.42 1447.99,2456.38 U3.43@1533.54,2456.38
NetR32_DriverChannelDRV88251_2: R32_DriverChannelDRV88251.2 U7_DriverChannelDRV88251.9 | length 483.3
  Top Layer w12: U7_DriverChannelDRV88251.9@693.39,692.8 693.39,591.61 v2(700,585)
  Top Layer w40: R32_DriverChannelDRV88251.2@935,682.05 v2(935,750)
  Bottom Layer w40: v2(700,585) 775,585 v2(935,750)
NetR32_DriverChannelDRV88252_2: R32_DriverChannelDRV88252.2 U7_DriverChannelDRV88252.9 | length 483.3
  Top Layer w12: U7_DriverChannelDRV88252.9@1568.39,692.8 1568.39,591.61 v2(1575,585)
  Top Layer w40: R32_DriverChannelDRV88252.2@1810,682.05 v2(1810,750)
  Bottom Layer w40: v2(1575,585) 1650,585 v2(1810,750)
NetR32_DriverChannelDRV88253_2: R32_DriverChannelDRV88253.2 U7_DriverChannelDRV88253.9 | length 483.3
  Top Layer w12: U7_DriverChannelDRV88253.9@2443.39,692.8 2443.39,591.61 v2(2450,585)
  Top Layer w40: R32_DriverChannelDRV88253.2@2685,682.05 v2(2685,750)
  Bottom Layer w40: v2(2450,585) 2525,585 v2(2685,750)
NetR32_DriverChannelDRV88254_2: R32_DriverChannelDRV88254.2 U7_DriverChannelDRV88254.9 | length 483.3
  Top Layer w12: U7_DriverChannelDRV88254.9@3318.39,692.8 3318.39,591.61 v2(3325,585)
  Top Layer w40: R32_DriverChannelDRV88254.2@3560,682.05 v2(3560,750)
  Bottom Layer w40: v2(3325,585) 3400,585 v2(3560,750)
NetR32_DriverChannelDRV88255_2: R32_DriverChannelDRV88255.2 U7_DriverChannelDRV88255.9 | length 483.3
  Top Layer w12: U7_DriverChannelDRV88255.9@4193.39,692.8 4193.39,591.61 v2(4200,585)
  Top Layer w40: R32_DriverChannelDRV88255.2@4435,682.05 v2(4435,750)
  Bottom Layer w40: v2(4200,585) 4275,585 v2(4435,750)
NetR33_DriverChannelDRV88251_2: R33_DriverChannelDRV88251.2 U7_DriverChannelDRV88251.6 | length 481.8
  Top Layer w12: v2(610,585) 616.61,591.61 U7_DriverChannelDRV88251.6@616.61,692.8
  Top Layer w40: R33_DriverChannelDRV88251.2@375,682.05 v2(375,750)
  Bottom Layer w40: v2(375,750) 540,585 v2(610,585)
NetR33_DriverChannelDRV88252_2: R33_DriverChannelDRV88252.2 U7_DriverChannelDRV88252.6 | length 481.8
  Top Layer w12: v2(1485,585) 1491.61,591.61 U7_DriverChannelDRV88252.6@1491.61,692.8
  Top Layer w40: R33_DriverChannelDRV88252.2@1250,682.05 v2(1250,750)
  Bottom Layer w40: v2(1250,750) 1415,585 v2(1485,585)
NetR33_DriverChannelDRV88253_2: R33_DriverChannelDRV88253.2 U7_DriverChannelDRV88253.6 | length 481.8
  Top Layer w12: v2(2360,585) 2366.61,591.61 U7_DriverChannelDRV88253.6@2366.61,692.8
  Top Layer w40: R33_DriverChannelDRV88253.2@2125,682.05 v2(2125,750)
  Bottom Layer w40: v2(2125,750) 2290,585 v2(2360,585)
NetR33_DriverChannelDRV88254_2: R33_DriverChannelDRV88254.2 U7_DriverChannelDRV88254.6 | length 481.8
  Top Layer w12: v2(3235,585) 3241.61,591.61 U7_DriverChannelDRV88254.6@3241.61,692.8
  Top Layer w40: R33_DriverChannelDRV88254.2@3000,682.05 v2(3000,750)
  Bottom Layer w40: v2(3000,750) 3165,585 v2(3235,585)
NetR33_DriverChannelDRV88255_2: R33_DriverChannelDRV88255.2 U7_DriverChannelDRV88255.6 | length 481.8
  Top Layer w12: v2(4110,585) 4116.61,591.61 U7_DriverChannelDRV88255.6@4116.61,692.8
  Top Layer w40: R33_DriverChannelDRV88255.2@3875,682.05 v2(3875,750)
  Bottom Layer w40: v2(3875,750) 4040,585 v2(4110,585)
NetR45_1: R45.1 R46.1 TP41.1 U8.16 | length 3152.6
  Top Layer w12: v1(805,3800) 805,3909.53 R46.1@805.47,3910 805.47,3955.95 R45.1@810,3960.47 ; v2(875,3405) 1063.13,3405 1339.13,3129 3136.65,3129 3190.43,3075.22 U8.16@3190.43,3011.22
  Bottom Layer w12: TP41.1@805,3850 v1(805,3800) 805,3475 v2(875,3405)
NetR52_1: R52.1 R55.1 TP42.1 U8.14 | length 3616.9
  Top Layer w12: R52.1@375,3960.47 375,3914.53 R55.1@370.47,3910 370.47,3479.53 417,3433 1062,3433 1347,3148 3144.52,3148 3241.61,3050.91 U8.14@3241.61,3011.22
  Bottom Layer w12: v1(370,3805) 370.47,3805.47 TP42.1@370.47,3850.47
NetR58_1: R58.1 R59.1 TP48.1 U8.13 | length 1925.2
  Top Layer w12: R58.1@1835,3550.47 1835,3495 v1(1835,3305) 1835,3213.11 1881.11,3167 3152.39,3167 3267.2,3052.19 U8.13@3267.2,3011.22
  Bottom Layer w12: TP48.1@1835,3257 v1(1835,3305)
NetR62_1: R62.1 R63.1 TP49.1 U8.12 | length 1578.6
  Top Layer w12: R62.1@2234,3580.47 2234,3218.11 2266.11,3186 3160.26,3186 3292.8,3053.46 U8.12@3292.8,3011.22
  Bottom Layer w12: TP49.1@2235,3258 v1(2235,3305)
NetR66_1: R66.1 R67.1 TP50.1 U8.11 | length 1201.5
  Top Layer w12: R66.1@2640,3580.05 2640,3225 2660,3205 3168.13,3205 3318.39,3054.74 U8.11@3318.39,3011.22
  Bottom Layer w12: TP50.1@2640,3256 v1(2640,3310)
NetR70_1: R70.1 R71.1 TP51.1 U8.10 | length 816.3
  Top Layer w12: R70.1@3040,3580.05 v1(3040,3320) 3040,3260 3075,3225 3175,3225 3343.98,3056.02 U8.10@3343.98,3011.22
  Bottom Layer w12: TP51.1@3040,3257 v1(3040,3320)
NetT2_ThermocoupleChannel1_1: T2_ThermocoupleChannel1.1 U4_ThermocoupleChannel1.3 | length 337.6
  Top Layer w15: U4_ThermocoupleChannel1.3@3635,2555.51 3635,2600 3684.49,2649.49 3760,2649.49 3814.49,2595 T2_ThermocoupleChannel1.1@3885,2595
NetT2_ThermocoupleChannel1_2: T2_ThermocoupleChannel1.2 U4_ThermocoupleChannel1.2 | length 377.3
  Top Layer w15: U4_ThermocoupleChannel1.2@3585,2555.51 3585,2588.84 3667.65,2671.49 3757,2671.49 3780.51,2695 T2_ThermocoupleChannel1.2@3885,2695